# Altium PCB Magnetic_Encoder.PcbDoc
Units mil, origin at the board's own origin, x right, y up, seen from the top; angles counter-clockwise.
Board outline 574.8 x 633.86 mil, 2 copper layers (Top Layer, Bottom Layer); 10 components, 10 nets, 33 pads, 6 vias.
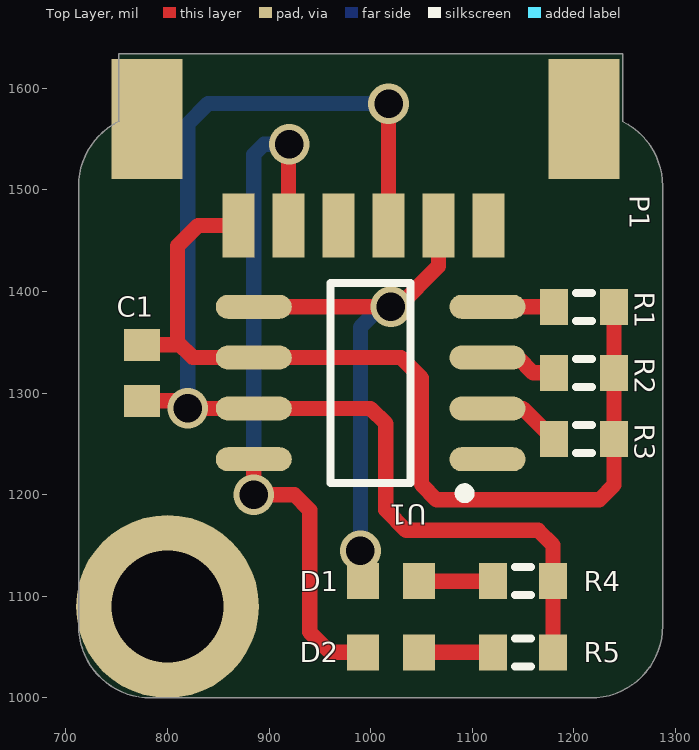
[diagram p0: Top Layer view]
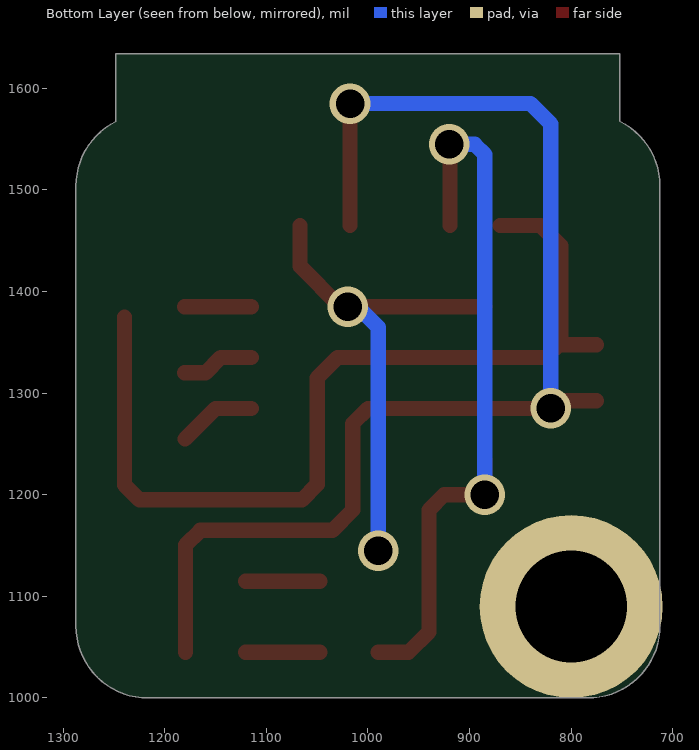
[diagram p1: Bottom Layer view, seen from below]

## Layer stack, top to bottom
Top Layer: signal copper 1.4
Dielectric: dielectric 12.6, FR-4, Dk 4.8
Bottom Layer: signal copper 1.4

## Board outline
712.6,1070.87 712.6,1503.94 cw(c783.46,1503.94) 751.97,1567.42 751.97,1633.86 1248.03,1633.86 1248.03,1567.42 cw(c1216.54,1503.94) 1287.4,1503.94 1287.4,1070.87 cw(c1216.54,1070.87) 1216.54,1000 783.46,1000 cw(c783.46,1070.87)

## Design rules (kind name [scope] priority, off if disabled: settings)
Clearance [All] p1: gap=10
MatchedLengths MatchLengths_U1_Passives_C1,D1,D2,P1,P_extra,R1,R2,R3,R4,R5 [InxSignalClass('xSignals_U1_Passives_C1,D1,D2,P1,P_extra,R1,R2,R3,R4,R5_MatchLengthsClass')] p1: tolerance=100 checknetsindiffpair=FALSE checkdiffpairvsdiffpair=TRUE checkothers=TRUE
MatchedLengths MatchLengths_xSignals_U1_Passives [InxSignalClass('xSignals_U1_Passives_MatchLengthsClass')] p2: tolerance=100 checknetsindiffpair=FALSE checkdiffpairvsdiffpair=TRUE checkothers=TRUE
MatchedLengths MatchLengths_xSignals_U1_C1,D1,D2,P1,P_extra,R1,R2,R3,R4,R5 [InxSignalClass('xSignals_U1_C1,D1,D2,P1,P_extra,R1,R2,R3,R4,R5_MatchLengthsClass')] p3: tolerance=100 checknetsindiffpair=FALSE checkdiffpairvsdiffpair=TRUE checkothers=TRUE
PolygonConnect [All] p1: connectstyle=Relief reliefconductorwidth=10 reliefentries=4 polygonreliefangle="90 Angle"
RoutingVias [All] p1: holewidth=28 width=50 viastyle="Through Hole" minholewidth=28 minwidth=50 maxholewidth=28 maxwidth=50
SilkscreenOverComponentPads SilkToSolderMaskClearance [IsPad] p1: minsilkscreentomaskgap=10
SolderMaskExpansion [All] p1: expansion=4
Width [All] p1: maxlimit=25 minlimit=10 preferedwidth=15 minimp=50.000000 maximp=50.000000 favimp=50.000000
27 further rules are at their usual default settings.

## Components (designator, comment, footprint, x,y, rotation, side; value= is the part's Value field where it differs from the comment)
C1 "Cap Semi" 1608[0603] 775,1320 r90 top
D1 "GREEN_LED" 1608[0603] 1020,1115 r0 top
D2 "RED_LED" 1608[0603] 1020,1045 r0 top
P1 "Molex PicoBlade 6 Right" "Molex PicoBlade 6 Right SMD" 870,1465 r0 top
R1 "Res3" J1-0603 1210,1385 r180 top
R2 "Res3" J1-0603 1210,1320 r180 top
R3 "Res3" J1-0603 1210,1255 r180 top
R4 "Res3" J1-0603 1150,1115 r0 top
R5 "Res3" J1-0603 1150,1045 r0 top
U1 "TLE5012B" SO-8 1000,1310 r180 top

## Footprints (in the part's own frame and the unit in brackets; to place one, negate y for a bottom-side part, rotate by r counter-clockwise, add the part's x,y. Pads: shape width x height; smd on the part's side, far side on the other; paste and mask are expansions set on the pad)
1608[0603] [mm] "Chip Capacitor, Body 1.6x0.8mm, IPC High Density"
  rect 0.8x0.9 smd: 1(-0.7,0) 2(0.7,0)
  body extent -0.87,-0.48 0.87,0.48, height 1.3
J1-0603 [mm] "Chip Resistor, Body 1.6x0.8mm, IPC High Density"
  rect 0.7x0.9 smd: 1(-0.75,0) 2(0.75,0)
  silkscreen extent -0.2,-0.35 0.2,0.35, body extent -0.85,-0.48 0.85,0.48, height 0.9
"Molex PicoBlade 6 Right SMD" [mm]
  rect 0.8x1.6 smd: 1(0,0) 2(1.25,0) 3(2.5,0) 4(3.75,0) 5(5,0) 6(6.25,0)
  rect 1.778x3 smd: SHD(-2.286,2.667) SHD(8.636,2.667)
  body extent -3.15,-0.16 9.5,5.04, height 3.4
SO-8 [mm]
  oval 1.9x0.6 smd: 1(-2.921,1.905) 2(-2.921,0.635) 3(-2.921,-0.635) 4(-2.921,-1.905) 5(2.921,-1.905) 6(2.921,-0.635) 7(2.921,0.635) 8(2.921,1.905)
  silkscreen extent -2.48,-2.5 1,2.88, body extent -1.95,-2.45 1.95,2.45, height 1.75

## Part data
C1: "Capacitor (Semiconductor SIM Model)"
D1 D2: library part LED2, "Typical RED, GREEN, YELLOW, AMBER GaAs LED"
R1 R2 R3 R4 R5: "Resistor"
U1: "TLE5012BE1000XUMA1"

## Free pads (board coordinates)
  round 180 hole 110: 1(800,1090)

## Via types
v1: diameter 40, hole 28, Top Layer to Bottom Layer, tented both sides, 6 vias

## Nets (pads, with @x,y where several pads share a name; then routed paths per layer and width w, separated by ;. In a path a pad name is that pad's centre, name@x,y a point inside that pad or via, vN(x,y) a via of type N, cw(c..) or ccw(c..) an arc to the next point about the centre after c; other vN are vias at no path point)
CSQ: R2.2 U1.3 | length 71.7
  Top Layer w15: U1.3 1145,1335 1160,1320 R2.2
DATA: R1.2 U1.4 | length 65.5
  Top Layer w15: U1.4 1160,1385 R1.2
GND: C1.1 P1.4 R4.2 R5.2 U1.7 | length 1224.5
  Top Layer w15: C1.1 812.56,1292.44 v1(820,1285) U1.7 1000,1285 1015,1270 1015,1185 1035,1165 1165,1165 1179.53,1150.47 R4.2 R5.2 ; P1.4 v1(1017.64,1585)
  Bottom Layer w15: v1(820,1285) 820,1565 840,1585 v1(1017.64,1585)
INC_A: D1.1 P1.5 U1.5 | length 489.9
  Top Layer w15: U1.5 v1(1020,1385) ; v1@1026.85,1385 1066.85,1425 P1.5
  Bottom Layer w15: v1(990,1145) 990,1365 1010,1385 v1(1020,1385)
INC_B: D2.1 P1.2 U1.8 | length 733.6
  Top Layer w15: U1.8 v1(885,1200) 885,1190 890,1195 895,1200 925,1200 940,1185 940,1065 960,1045 D2.1@990,1045 ; P1.2 v1@919.21,1535.79
  Bottom Layer w15: v1(885,1200) 885,1535 895,1545 v1(920,1545)
NetD1_2: D1.2 R4.1 | length 72.9
  Top Layer w15: D1.2 R4.1
NetD2_2: D2.2 R5.1 | length 72.9
  Top Layer w15: D2.2 R5.1
NetP_extra_4: U1.1
SCK: R3.2 U1.2 | length 77.4
  Top Layer w15: U1.2 1150,1285 R3.2@1180,1255
VCC: C1.2 P1.1 R1.1 R2.1 R3.1 U1.6 | length 941
  Top Layer w15: C1.2 807.56,1347.56 810,1350 ; 810,1365 810,1350 ; P1.1 830,1465 810,1445 810,1350 ; R1.1@1239.53,1375 R2.1 R3.1 1239.53,1209.53 1225,1195 1065,1195 1050,1210 1050,1315 1030,1335 U1.6 825,1335 810,1350
pads on no net: P1.3 P1.6 P1.SHD

## Silkscreen, mask and mechanical layers (free items; w line width, h text height)
Mechanical 1:
  the board outline again, w5